# Altium PCB pcb.pcbdoc
Units mil, origin at the board's own origin, x right, y up, seen from the top; angles counter-clockwise.
Board outline 5725 x 7900 mil, 2 copper layers (Top Layer, Bottom Layer); 27 components, 170 nets, 303 pads, 64 vias.
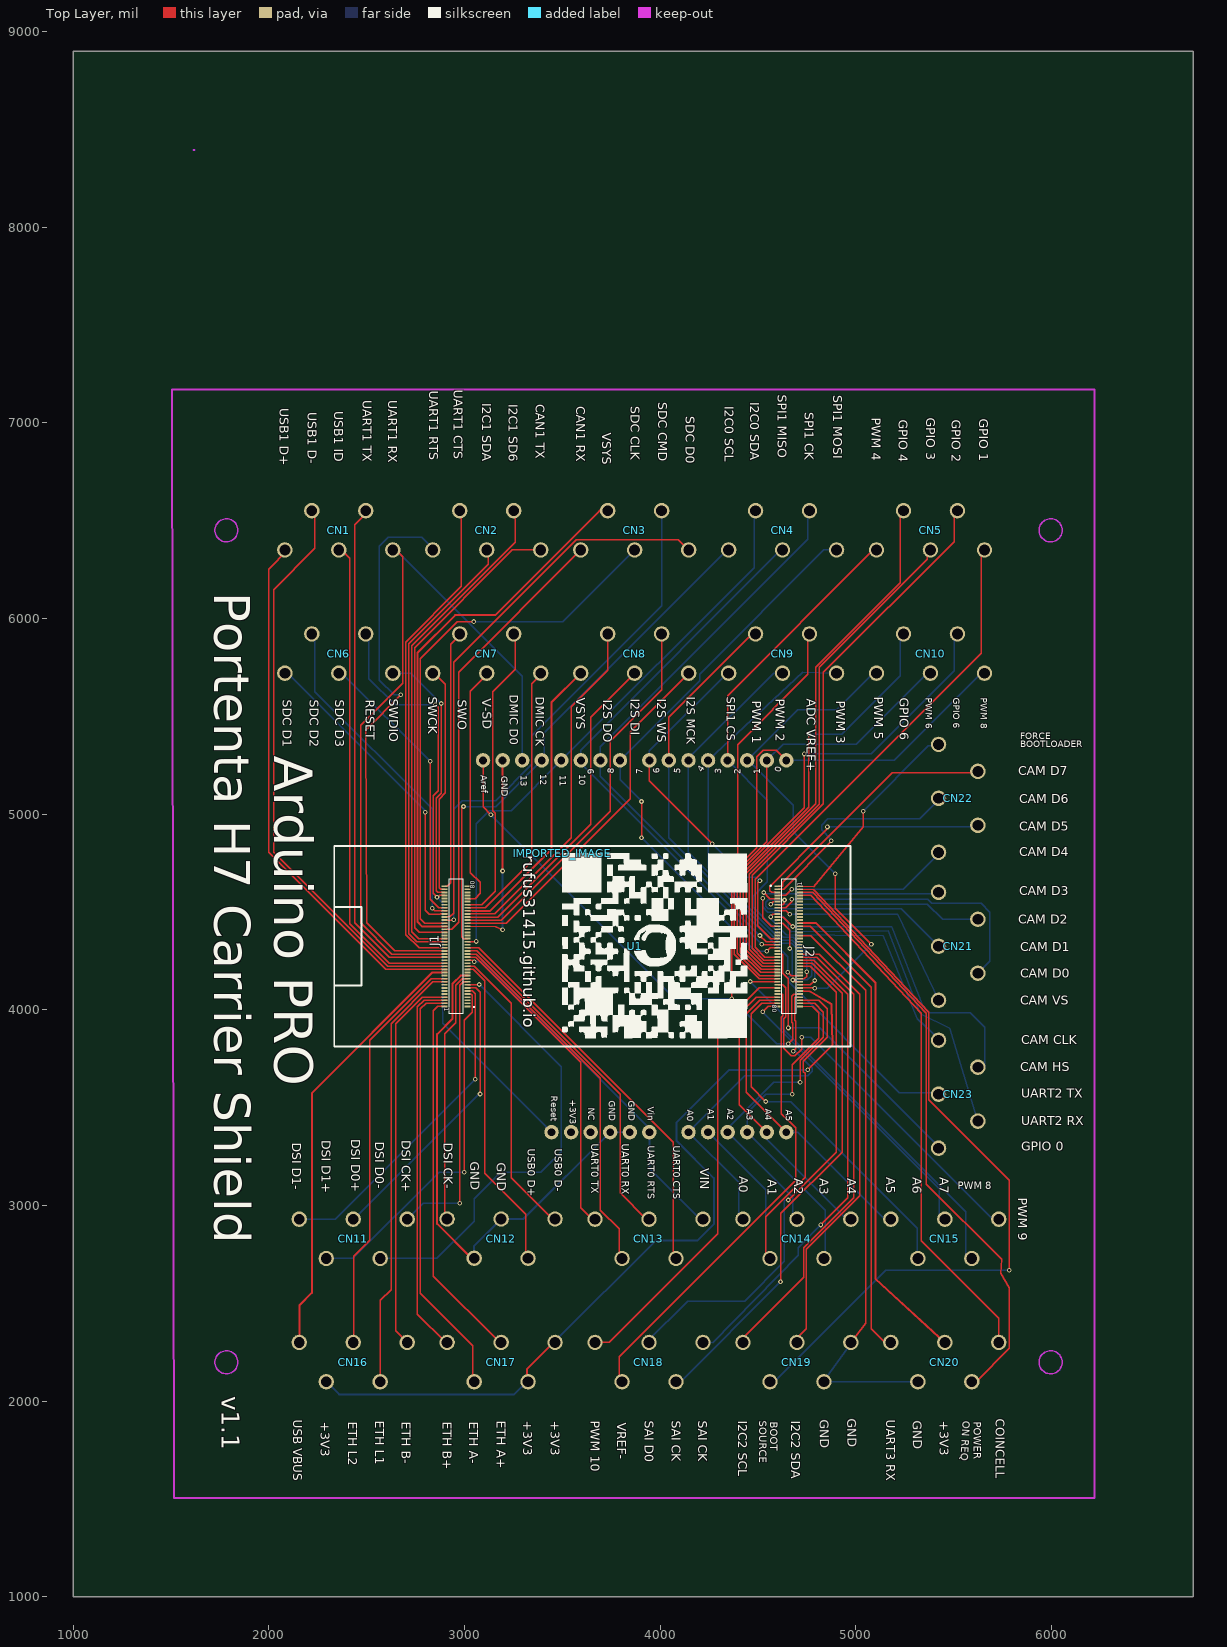
[diagram p0: Top Layer view]
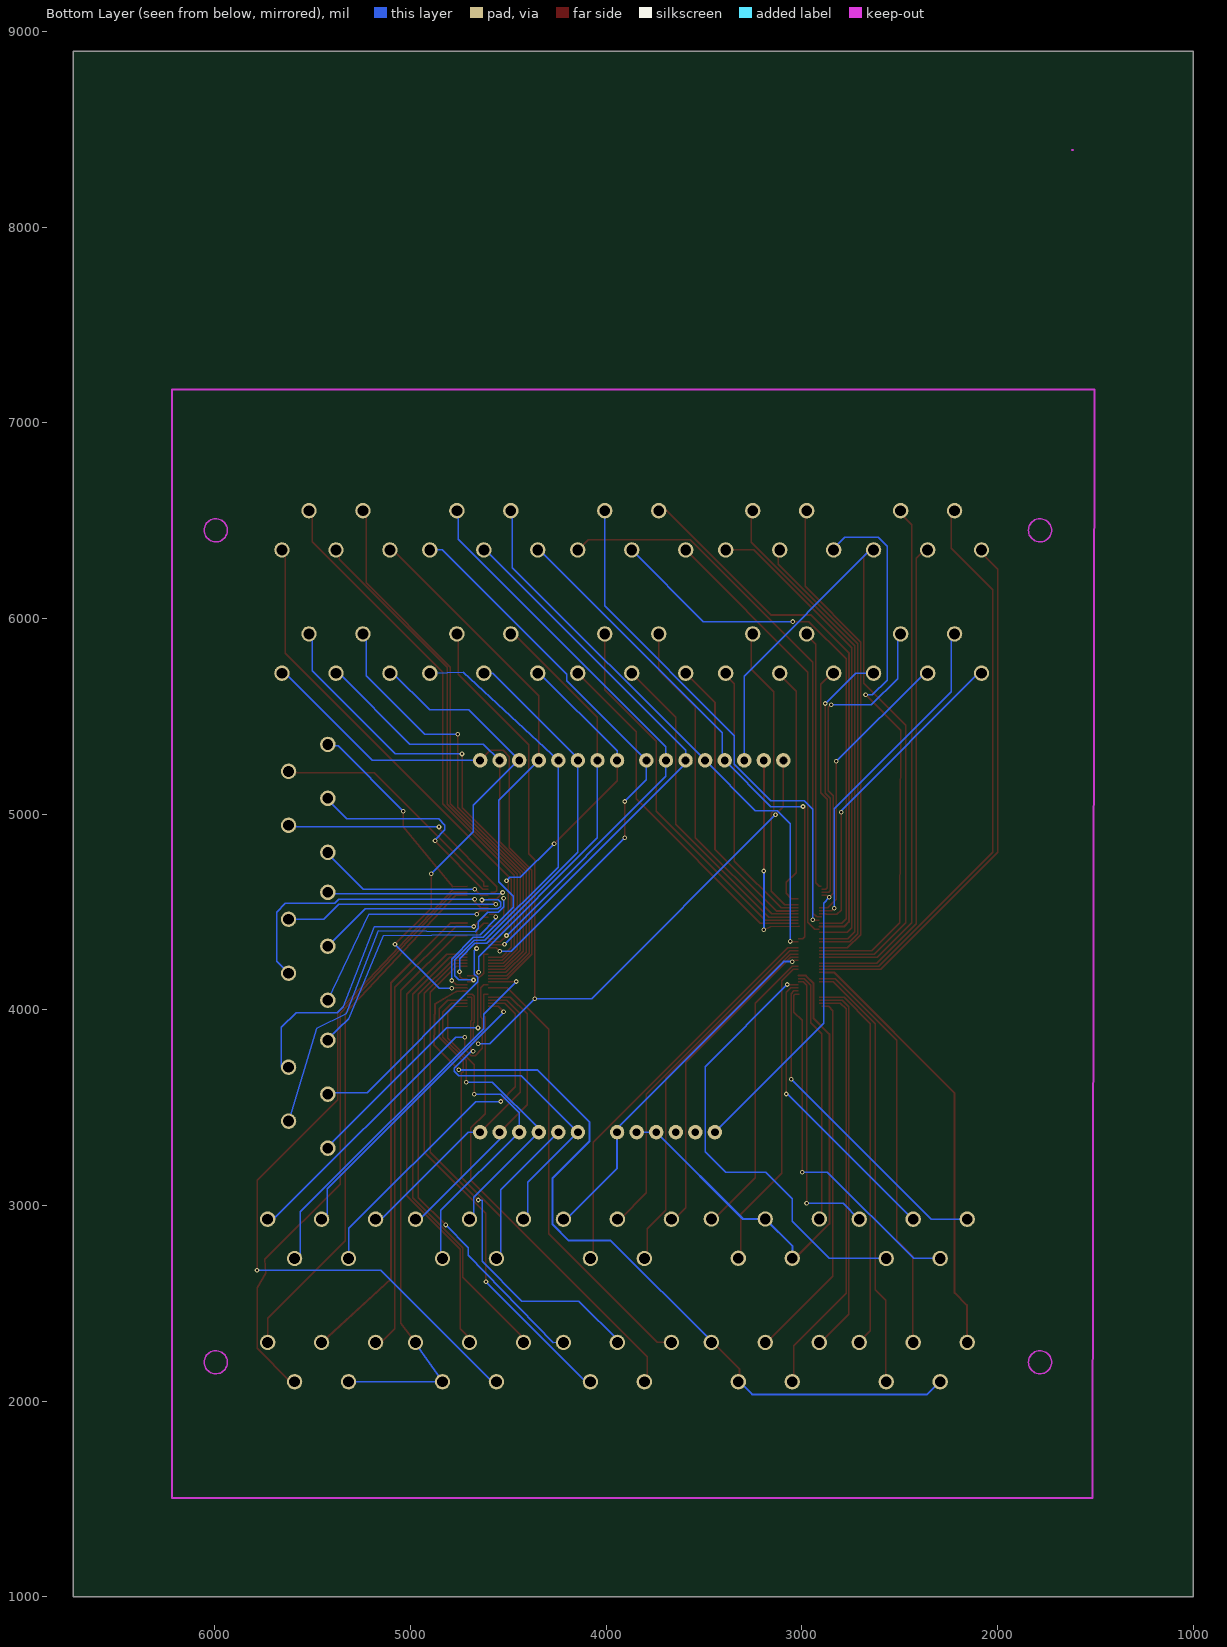
[diagram p1: Bottom Layer view, seen from below]

## Layer stack, top to bottom
Top Layer: signal copper (thickness not stored)
Dielectric: dielectric 12.6, FR-4, Dk 4.8
Bottom Layer: signal copper (thickness not stored)

## Board outline
6725,1000 1000,1000 1000,8900 6725,8900

## Components (designator, comment, footprint, x,y, rotation, side; value= is the part's Value field where it differs from the comment)
CN1 "WJ250B-3.50-5P" WJ250B-3.50-5P 2358.15,6451 r180 top
CN2 "WJ250B-3.50-5P" WJ250B-3.50-5P 3114.05,6451 r180 top
CN3 "WJ250B-3.50-5P" WJ250B-3.50-5P 3870.05,6451 r180 top
CN4 "WJ250B-3.50-5P" WJ250B-3.50-5P 4625.95,6451 r180 top
CN5 "WJ250B-3.50-5P" WJ250B-3.50-5P 5381.85,6451 r180 top
CN6 "WJ250B-3.50-5P" WJ250B-3.50-5P 2358.15,5821.1 r180 top
CN7 "WJ250B-3.50-5P" WJ250B-3.50-5P 3114.05,5821.1 r180 top
CN8 "WJ250B-3.50-5P" WJ250B-3.50-5P 3870.05,5821.1 r180 top
CN9 "WJ250B-3.50-5P" WJ250B-3.50-5P 4625.95,5821.1 r180 top
CN10 "WJ250B-3.50-5P" WJ250B-3.50-5P 5381.85,5821.1 r180 top
CN11 "WJ250B-3.50-5P" WJ250B-3.50-5P 2431.38,2829.92 r0 top
CN12 "WJ250B-3.50-5P" WJ250B-3.50-5P 3187.28,2830.98 r0 top
CN13 "WJ250B-3.50-5P" WJ250B-3.50-5P 3943.19,2829.92 r0 top
CN14 "WJ250B-3.50-5P" WJ250B-3.50-5P 4699.1,2829.92 r0 top
CN15 "WJ250B-3.50-5P" WJ250B-3.50-5P 5455,2829.92 r0 top
CN16 "WJ250B-3.50-5P" WJ250B-3.50-5P 2431.38,2200 r0 top
CN17 "WJ250B-3.50-5P" WJ250B-3.50-5P 3187.28,2200 r0 top
CN18 "WJ250B-3.50-5P" WJ250B-3.50-5P 3943.19,2200 r0 top
CN19 "WJ250B-3.50-5P" WJ250B-3.50-5P 4699.1,2200 r0 top
CN20 "WJ250B-3.50-5P" WJ250B-3.50-5P 5455,2200 r0 top
CN21 "WJ250B-3.50-5P" WJ250B-3.50-5P 5523.55,4325 r90 top
CN22 "WJ250B-3.50-5P" WJ250B-3.50-5P 5523.54,5080.9 r90 top
CN23 "WJ250B-3.50-5P" WJ250B-3.50-5P 5523.54,3569.1 r90 top
IMPORTED_IMAGE "IMPORTED_IMAGE" IMPORTED_IMAGE 3499.66,4799.65 r0 top
J1 "DF40C-80DP-0.4V_51_" DF40C80DP04V51 2956.61,4325 r90 top
J2 "DF40C-80DP-0.4V_51_" DF40C80DP04V51 4657.4,4325 r270 top
U1 "ARDUINO_SHIELDNO_SILK BIG" DUEMILANOVE_VIAS 3870,4325 r270 top

## Footprints (in the part's own frame and the unit in brackets; to place one, negate y for a bottom-side part, rotate by r counter-clockwise, add the part's x,y. Pads: shape width x height; smd on the part's side, far side on the other; paste and mask are expansions set on the pad)
DF40C80DP04V51 [mm]
  rect 0.23x0.787 smd: 1(-7.8,1.482) 2(-7.8,-1.482) 3(-7.4,1.482) 4(-7.4,-1.482) 5(-7,1.482) 6(-7,-1.482) 7(-6.6,1.482) 8(-6.6,-1.482) 9(-6.2,1.482) 10(-6.2,-1.482) 11(-5.8,1.482) 12(-5.8,-1.482) 13(-5.4,1.482) 14(-5.4,-1.482) 15(-5,1.482) 16(-5,-1.482) 17(-4.6,1.482) 18(-4.6,-1.482) 19(-4.2,1.482) 20(-4.2,-1.482) 21(-3.8,1.482) 22(-3.8,-1.482) 23(-3.4,1.482) 24(-3.4,-1.482) 25(-3,1.482) 26(-3,-1.482) 27(-2.6,1.482) 28(-2.6,-1.482) 29(-2.2,1.482) 30(-2.2,-1.482) 31(-1.8,1.482) 32(-1.8,-1.482) 33(-1.4,1.482) 34(-1.4,-1.482) 35(-1,1.482) 36(-1,-1.482) 37(-0.6,1.482) 38(-0.6,-1.482) 39(-0.2,1.482) 40(-0.2,-1.482) 41(0.2,1.482) 42(0.2,-1.482) 43(0.6,1.482) 44(0.6,-1.482) 45(1,1.482) 46(1,-1.482) 47(1.4,1.482) 48(1.4,-1.482) 49(1.8,1.482) 50(1.8,-1.482) 51(2.2,1.482) 52(2.2,-1.482) 53(2.6,1.482) 54(2.6,-1.482) 55(3,1.482) 56(3,-1.482) 57(3.4,1.482) 58(3.4,-1.482) 59(3.8,1.482) 60(3.8,-1.482) 61(4.2,1.482) 62(4.2,-1.482) 63(4.6,1.482) 64(4.6,-1.482) 65(5,1.482) 66(5,-1.482) 67(5.4,1.482) 68(5.4,-1.482) 69(5.8,1.482) 70(5.8,-1.482) 71(6.2,1.482) 72(6.2,-1.482) 73(6.6,1.482) 74(6.6,-1.482) 75(7,1.482) 76(7,-1.482) 77(7.4,1.482) 78(7.4,-1.482) 79(7.8,1.482) 80(7.8,-1.482)
  silkscreen extent -8.76,-2.39 8.76,0.88
DUEMILANOVE_VIAS [mil]
  round 74 hole 40: 3.3V(950,-325) 5V(950,-225) A0(950,275) A1(950,375) A2(950,475) A3(950,575) A4(950,675) A5(950,775) AREF(-950,-775) D2(-950,575) D3(-950,475) D4(-950,375) D5(-950,275) D6(-950,175) D7(-950,75) D8(-950,-75) D9(-950,-175) D10(-950,-275) D11(-950,-375) D12(-950,-475) D13(-950,-575) GND@0(950,-125) GND@1(950,-25) GND@2(-950,-675) RES(950,-425) RX(-950,775) TX(-950,675) VIN(950,75)
IMPORTED_IMAGE [mil]
  silkscreen extent 0,-945 945,0
WJ250B-3.50-5P [mm]
  round 2 hole 1.402: 1(-7.007,2.55) 4(-3.496,-2.55) 5(0.006,2.55) 8(3.506,-2.55) 9(7.007,2.55)

## Via types
v1: diameter 24.02, hole 12.2, Top Layer to Bottom Layer, 64 vias

## Nets (pads, with @x,y where several pads share a name; then routed paths per layer and width w, separated by ;. In a path a pad name is that pad's centre, name@x,y a point inside that pad or via, vN(x,y) a via of type N, cw(c..) or ccw(c..) an arc to the next point about the centre after c; other vN are vias at no path point)
J1_1: CN17.5 J1.1 | length 1902.3
  Top Layer w7.09: J1.1 2862.9,4017.9 2841.8,3996.8 2841.8,2639.7 CN17.5@3181.2,2300.4
J1_2: J1.2
J1_3: CN17.4 J1.3 | length 2164.5
  Top Layer w7.09: J1.3@2911.1,4033.7 2803.7,4033.7 2775,4005 2775,2552.4 3043.3,2284.1 CN17.4@3043.3,2099.6
J1_4: J1.4
J1_5: CN17.1 J1.5 | length 1940.1
  Top Layer w7.09: CN17.1@2905.1,2300.4 2760,2445.5 2760,4015 2794.4,4049.4 J1.5@2911.1,4049.4
J1_6: J1.6
J1_7: CN16.9 J1.7 | length 1971
  Top Layer w7.09: CN16.9@2708.7,2300.4 2650,2359.1 2650,3930 2785.2,4065.2 2888.2,4065.2 J1.7@2911.1,4065.2
J1_8: J1.8
J1_9: J1.9
J1_10: CN11.4 J1.10 | length 1835.6
  Top Layer w7.09: v1(2999.2,3170.7) 2999.2,3946.6 3040.8,3988.2 3040.8,4073.8 3035,4080 J1.10
  Bottom Layer w7.09: CN11.4@2295.2,2729.5 2429.5,2729.5 2870.7,3170.7 v1(2999.2,3170.7)
J1_11: J1.11
J1_12: CN11.1 J1.12 | length 1674.5
  Top Layer w7.09: J1.12@3017.8,4096.6 3040.8,4096.6 3054.3,4083.1 3054.3,3645.7 v1(3055,3645)
  Bottom Layer w7.09: CN11.1@2157,2930.3 2340.3,2930.3 v1(3055,3645)
J1_13: J1.13
J1_14: CN11.5 J1.14 | length 1503.4
  Top Layer w7.09: J1.14@3017.8,4112.4 3040.8,4112.4 3057.6,4112.4 3080,4090 v1(3080,3570)
  Bottom Layer w7.09: CN11.5@2433.1,2930.3 3072.8,3570 v1(3080,3570)
J1_15: J1.15
J1_16: CN11.8 J1.16 | length 2305.8
  Top Layer w7.09: J1.16@3017.84,4128.15 3073.15,4128.15 v1(3075,4130)
  Bottom Layer w7.09: CN11.8 2859.53,2729.53 3050,2920 3050,3035 3185,3170 3390,3170 3495,3275 3495,3710 v1(3075,4130)
J1_17: CN16.8 J1.17 | length 2227.5
  Top Layer w7.09: CN16.8@2570.9,2099.6 2570.9,2515.9 2625,2570 2625,3930 2838.9,4143.9 2888.2,4143.9 J1.17@2911.1,4143.9
J1_18: CN11.9 J1.18 | length 1464.8
  Top Layer w7.09: v1(2976.4,3011.7) 2976.4,4126.4 2993.9,4143.9 J1.18@3017.8,4143.9
  Bottom Layer w7.09: CN11.9@2708.7,2930.3 2790.1,3011.7 v1(2976.4,3011.7)
J1_19: CN16.5 J1.19 | length 2104.9
  Top Layer w7.09: CN16.5@2433.1,2300.4 2433.1,2741.7 2515,2823.6 2515,3845 2829.6,4159.6 J1.19@2911.1,4159.6
J1_20: CN12.1 J1.20 | length 1294.8
  Top Layer w7.09: CN12.1@2899.2,2930.4 2899.2,3879.2 2955,3935.1 2955,4125 2989.6,4159.6 2994.9,4159.6 J1.20@3017.8,4159.6
J1_21: J1.21
J1_22: CN12.4 CN12.5 J1.22 U1.GND@0 U1.GND@1 | length 2711.6
  Top Layer w10.24: J1.22@3017.8,4175.4 2980.4,4175.4 2940,4135 2940,3956 2860,3876 2860,2907 3037.5,2729.5 CN12.4@3043.3,2729.5
  Bottom Layer w7.09: 3745,3375 3845,3375
  Bottom Layer w10.24: CN12.4 3049.63,2793.48 CN12.5 3301.38,2931.38 3745,3375
J1_23: CN16.1 J1.23 | length 2247
  Top Layer w7.09: J1.23@2888.2,4191.1 J1.23@2911.1,4191.1
  Top Layer w10.24: CN16.1@2157,2300.4 2157,2491.4 2220,2554.4 2220,3575 2836.1,4191.1 J1.23@2888.2,4191.1
J1_24: J1.24
J1_25: CN1.9 J1.25 | length 2745.1
  Top Layer w7.09: CN1.9@2098.1,6350.6 2000,6252.5 2000,4805 2598.1,4206.9 2888.2,4206.9 J1.25@2911.1,4206.9
J1_26: CN12.8 J1.26 | length 1615.7
  Top Layer w7.09: J1.26@3017.8,4206.9 3045.3,4206.9 3103.6,4148.6 3103.6,3164.3 3313.05,2954.85 CN12.8@3313.05,2729.6
J1_27: CN1.8 J1.27 | length 2961.1
  Top Layer w7.09: CN1.8@2235.9,6551.4 2235.9,6358 2025,6147.1 2025,4805 2607.4,4222.6 J1.27@2911.1,4222.6
J1_28: CN12.9 J1.28 | length 1490.6
  Top Layer w7.09: J1.28@3017.8,4222.6 3040.8,4222.6 3050.3,4222.6 3238.2,4034.7 3238.2,3143.04 CN12.9@3450.85,2930.39
J1_29: CN1.5 J1.29 | length 2507.3
  Top Layer w7.09: CN1.5@2373.7,6350.6 2415,6309.3 2415,4440 2616.6,4238.4 2888.2,4238.4 J1.29@2911.1,4238.4
J1_30: J1.30
J1_31: J1.31
J1_32: CN13.9 J1.32 U1.VIN | length 1855.4
  Top Layer w7.09: J1.32@3017.8,4254.1 3041.5,4254.1 v1(3049.5,4246.1)
  Bottom Layer w10.24: v1(3049.5,4246.1) 3093.9,4246.1 3945,3395 U1.VIN 3945,3190.1 CN13.9@4204.8,2930.3
J1_33: CN1.4 J1.33 | length 2679.7
  Top Layer w7.09: CN1.4@2511.6,6551.4 2440,6479.8 2440,4445 2615.1,4269.9 2888.2,4269.9 J1.33@2911.1,4269.9
J1_34: CN13.1 J1.34 | length 1625.6
  Top Layer w7.09: J1.34@3017.8,4269.9 3040.8,4269.9 3056.8,4269.9 3595,3731.6 3595,2988.4 CN13.1@3653.1,2930.3
J1_35: CN1.1 J1.35 U1.D13 | length 3859.2
  Top Layer w7.09: CN1.1@2649.8,6350.6 2685,6315.4 2685,5670.2 2470,5455.2 2470,4445 2629.4,4285.6 J1.35@2911.1,4285.6
  Bottom Layer w7.09: CN1.1@2649.8,6350.6 3295,5705.4 U1.D13
J1_36: CN13.4 J1.36 | length 1901.3
  Top Layer w7.09: J1.36@3017.8,4285.6 3060.1,4285.6 3695,3650.7 3695,2977.1 3791.3,2880.8 CN13.4@3791.3,2729.5
J1_37: CN2.9 J1.37 | length 2862.6
  Top Layer w7.09: v1(2675,5610) 2495,5430 2500,4445 2643.6,4301.4 J1.37@2911.1,4301.4
  Bottom Layer w7.09: v1(2675,5610) 2640,5610 2565,5685 2565,6370 2610,6415 2781.7,6415 CN2.9@2846.1,6350.6
J1_38: CN13.5 J1.38 | length 1775.4
  Top Layer w7.09: J1.38@3017.8,4301.4 3063.5,4301.4 3795,3569.8 3795,3064.5 CN13.5@3929.2,2930.3
J1_39: CN2.8 J1.39 | length 2523.2
  Top Layer w7.09: J1.39@2911.1,4317.1 2767.9,4317.1 2700,4385 2700,5880 2983.9,6163.9 CN2.8@2983.9,6551.4
J1_40: CN13.8 J1.40 | length 2054.7
  Top Layer w7.09: J1.40@3017.8,4317.1 3073.2,4317.1 4067,3323.4 CN13.8@4067,2729.5
J1_41: J1.41
J1_42: J1.42
J1_43: CN2.5 J1.43 | length 2342.3
  Top Layer w7.09: J1.43@2911.1,4348.6 2756.4,4348.6 2715,4390 2715,5870 3121.7,6276.7 CN2.5@3121.7,6350.6
J1_44: CN4.8 J1.44 U1.D11 | length 2898.9
  Top Layer w7.09: J1.44@3017.8,4348.6 3040.8,4348.6 3060,4348.6 v1(3060,4350)
  Bottom Layer w7.09: v1(3060,4350) 3060,4952.2 3126.3,5018.5 3238.5,5018.5 U1.D11 4480,6260 CN4.8@4480,6551.4
J1_45: CN2.4 J1.45 | length 2566.6
  Top Layer w7.09: J1.45@2911.1,4364.4 2765.6,4364.4 2730,4400 2730,5860 3259.6,6389.6 CN2.4@3259.6,6551.4
J1_46: CN4.9 J1.46 U1.D12 | length 2663.2
  Top Layer w7.09: v1@2985,5034.9 2985,4374.3 2994.9,4364.4 J1.46@3017.8,4364.4
  Bottom Layer w7.09: v1(2994.9,5039.3) 3159.3,5039.3 U1.D12 3408.5,5288.5 3408.5,5416.9 CN4.9@4342.2,6350.6
J1_47: J1.47
J1_48: J1.48
J1_49: CN2.1 J1.49 | length 2466.2
  Top Layer w7.09: J1.49@2911.1,4395.9 2888.2,4395.9 2769.1,4395.9 2745,4420 2745,5850 3245.6,6350.6 CN2.1@3397.8,6350.6
J1_50: J1.50
J1_51: CN3.9 J1.51 | length 2235.4
  Top Layer w7.09: J1.51@2911.1,4411.6 2934.1,4411.6 2970,4447.5 2970,5726.4 CN3.9
J1_52: J1.52
J1_53: CN3.8 J1.53 | length 2808.4
  Top Layer w10.24: J1.53@2911.1,4427.4 2782.6,4427.4 2760,4450 2760,5825 2952.9,6017.9 3157.4,6017.9 3690.8,6551.4 CN3.8
J1_54: J1.54 | length 183.1
  Top Layer w9.84: J1.54 3160,4425 3195,4410
J1_55: CN3.5 J1.55 | length 2800.1
  Top Layer w7.09: J1.55@2911.1,4443.1 2888.2,4443.1 2796.9,4443.1 2775,4465 2775,5795 2964.4,5984.4 v1(3047.4,5984.4)
  Bottom Layer w7.09: v1(3047.4,5984.4) 3503.6,5984.4 CN3.5
J1_56: CN8.1 J1.56 | length 1859.3
  Top Layer w7.09: J1.56@3017.8,4443.1 3040.8,4443.1 3213.1,4443.1 3847.9,5077.9 3847.9,5422.7 CN8.1
J1_57: CN3.4 J1.57 | length 2665.6
  Top Layer w7.09: J1.57@2911.1,4458.9 2937.4,4458.9 2938.5,4460 v1(2945,4460)
  Bottom Layer w7.09: v1(2945,4460) 2945,5024.5 2988.9,5068.4 3159,5068.4 3345,5254.4 3345,5401.8 4007.7,6064.4 CN3.4
J1_58: CN8.4 J1.58 | length 1972.9
  Top Layer w7.09: J1.58@3017.8,4458.9 3188.9,4458.9 3745,5015 3745,5372.2 4007.7,5634.9 CN8.4
J1_59: CN3.1 J1.59 | length 2815.6
  Top Layer w7.09: J1.59@2900,4475 2923,4475 ; 2925,4475 2945,4495 2945,5777.5 3570.6,6403.1 4093.4,6403.1 CN3.1
J1_60: CN8.5 J1.60 | length 1687.9
  Top Layer w7.09: J1.60@3017.8,4474.6 3040.8,4474.6 3169.6,4474.6 3645,4950 3645,5495.9 CN8.5
J1_61: CN6.9 J1.61 | length 1621.8
  Top Layer w7.09: v1(2800,5010) 2800,4510 2821,4489 2876.3,4489 2877.6,4490.3 J1.61@2911.1,4490.3
  Bottom Layer w7.09: CN6.9@2098.1,5720.7 2800,5018.8 v1(2800,5010)
J1_62: CN8.8 J1.62 | length 1807.6
  Top Layer w7.09: J1.62@3017.8,4490.3 3155.3,4490.3 3545,4880 3545,5549.7 3732,5736.7 CN8.8
J1_63: CN6.8 J1.63 | length 1731.5
  Top Layer w7.09: v1(2835,4520) 2848.9,4506.1 J1.63@2911.1,4506.1
  Bottom Layer w7.09: CN6.8@2235.9,5921.5 2235.9,5626.2 2835,5027.1 v1(2835,4520)
J1_64: CN8.9 J1.64 | length 1519.8
  Top Layer w7.09: J1.64@3017.8,4506.1 3040.8,4506.1
  Top Layer w10.24: 3040.8,4506.1 3131.2,4506.1 3445,4819.9 3445,5571.5 CN8.9
J1_65: CN6.5 J1.65 | length 1447
  Top Layer w7.09: v1(2825,5270) 2825,4565 2868.2,4521.8 2888.2,4521.8 J1.65@2911.1,4521.8
  Bottom Layer w7.09: CN6.5@2373.7,5720.7 2824.4,5270 v1(2825,5270)
J1_66: CN7.1 J1.66 | length 1408.4
  Top Layer w7.09: J1.66@3017.8,4521.8 3106.8,4521.8 3345,4760 3345,5667.8 CN7.1@3397.8,5720.7
J1_67: J1.67
J1_68: CN7.4 J1.68 | length 1535.1
  Top Layer w7.09: J1.68@3017.8,4537.6 3087.6,4537.6 3157.3,4607.3 3157.3,5005.7 3145,5018 3145,5625.8 3259.6,5740.5 CN7.4@3259.6,5921.5
J1_69: J1.69
J1_70: J1.70
J1_71: J1.71
J1_72: CN7.5 J1.72 | length 1257.3
  Top Layer w7.09: J1.72@3017.8,4569.1 3054.1,4569.1 3080,4595 3080,4651.4 3030,4701.4 3030,5629 CN7.5@3121.7,5720.7
J1_73: CN6.4 J1.73 U1.RES | length 3115.4
  Top Layer w7.09: v1(2850.8,5559.6) 2865,5545.4 2865,5120 2840,5095 2840,4595 v1(2860,4575) 2875,4585 J1.73
  Bottom Layer w7.09: CN6.4@2511.6,5921.5 2511.6,5693.4 2645.4,5559.6 v1(2850.8,5559.6) ; v1(2860,4575) 2889.1,4545.9 2889.1,3930.9 U1.RES
J1_74: J1.74
J1_75: CN6.1 J1.75 | length 1309.4
  Top Layer w7.09: v1(2881.2,5565.8) 2881.2,5107 2855,5080.8 2855,4610 2864.4,4600.6 J1.75
  Bottom Layer w7.09: CN6.1@2649.8,5720.7 2726.3,5720.7 v1(2881.2,5565.8)
J1_76: J1.76
J1_77: CN7.9 J1.77 | length 1164.9
  Top Layer w7.09: CN7.9@2846.1,5720.7 2903.1,5663.7 2903.1,5109.8 2870,5076.7 2870,4625 2878.7,4616.3 J1.77
J1_78: J1.78
J1_79: CN7.8 J1.79 | length 1329.9
  Top Layer w7.09: J1.79@2901.37,4632.09 2912.09,4632.09 2930,4650 2930,5867.6 CN7.8@2983.9,5921.5
J1_80: J1.80
J2_1: CN22.9 J2.1 | length 1074.2
  Top Layer w7.09: J2.1@4710.8,4632.1 4785,4630 5037.9,4936.3 v1(5037.9,5015.7)
  Bottom Layer w7.09: v1(5037.9,5015.7) 5371,5348.9 CN22.9@5423.2,5348.9
J2_2: CN22.8 J2.2 | length 1271.2
  Top Layer w7.09: J2.2@4604.1,4632.1 4627,4632.1 4627,4651.8 5186.3,5211.1 CN22.8@5623.9,5211.1
J2_3: CN19.4 J2.3 | length 3904.6
  Top Layer w7.09: J2.3@4710.8,4616.3 4785,4615 5373.7,3988.1 5373.7,3541.6 5785,3130.3 v1(5785,2670)
  Bottom Layer w7.09: CN19.4@4539.3,2099.6 4582.2,2099.6 5152.6,2670 v1(5785,2670)
J2_4: CN22.5 J2.4 | length 1127.7
  Top Layer w7.09: J2.4@4604.1,4616.3 4630.6,4616.3 4875,4860.7 v1(4875,4865)
  Bottom Layer w7.09: v1(4875,4865) 4875,4870.5 4825,4920.5 4825,4943.6 4857.5,4976.1 5326,4976.1 CN22.5@5423.2,5073.3
J2_5: CN20.8 J2.5 | length 3093.5
  Top Layer w7.09: J2.5@4710.8,4600.6 4780,4600 5360.2,3982.5 5360.2,3109.8 5745,2725 5740,2655 5785,2580 5785,2270 5614.6,2099.6 CN20.8@5563.1,2099.6
J2_6: CN22.4 J2.6 | length 1250.4
  Top Layer w7.09: J2.6@4590,4600 4570,4600 4560,4610 4560,4630 4855,4925 v1(4855,4935)
  Bottom Layer w7.09: v1(4855,4935) 4855.4,4935.4 CN22.4@5623.9,4935.4
J2_7: CN20.9 J2.7 | length 2732
  Top Layer w7.09: J2.7@4710.8,4584.8 4770,4585 5335,3983.5 5335,2820 5730,2425 5730,2300.4 CN20.9
J2_8: CN22.1 J2.8 | length 907
  Top Layer w7.09: J2.8@4604.1,4584.8 4641.1,4584.8 v1(4672.1,4615.8)
  Bottom Layer w7.09: v1(4672.1,4615.8) 5241.7,4615.8 CN22.1@5423.2,4797.2
J2_9: J2.9
J2_10: CN21.9 J2.10 | length 985.5
  Top Layer w7.09: v1(4530,4600) 4560.9,4569.1 4581.1,4569.1 J2.10@4604.1,4569.1
  Bottom Layer w7.09: v1(4530,4600) 4536.2,4593.8 5416.1,4593.8 CN21.9
J2_11: J2.11
J2_12: CN21.8 J2.12 | length 1112.5
  Top Layer w7.09: v1(4565,4540) 4578.3,4553.3 4581.1,4553.3
  Bottom Layer w7.09: v1(4565,4540) 5366.5,4540 5443.5,4463 CN21.8@5624,4463
J2_13: J2.13
J2_14: CN21.5 J2.14 | length 1139.2
  Top Layer w7.09: J2.14@4604.1,4537.6 4627,4537.6 4635.6,4546.2 v1(4635.6,4561.8)
  Bottom Layer w7.09: v1(4635.6,4561.8) 4551.8,4561.8 4540,4550 4540,4530 4553.9,4516.1 5232.3,4516.1 CN21.5
J2_15: J2.15
J2_16: CN21.4 J2.16 | length 1471.8
  Top Layer w7.09: J2.16@4604.1,4521.8 4642.9,4521.8 4673.2,4552.2 v1(4673.2,4565.4)
  Bottom Layer w7.09: v1(4673.2,4565.4) 5367,4565.4 5387.6,4544.8 5640.2,4544.8 5685,4500 5685,4248.3 CN21.4@5624,4187.3
J2_17: J2.17
J2_18: CN21.1 J2.18 | length 1105.6
  Top Layer w7.09: J2.18@4604.1,4506.1 4645.5,4506.1 v1(4662.7,4488.9)
  Bottom Layer w7.09: v1(4662.7,4488.9) 5215,4490 CN21.1
J2_19: J2.19
J2_20: CN23.9 J2.20 | length 1268.4
  Top Layer w7.09: v1(4565,4475) 4575,4490 J2.20@4599,4490
  Bottom Layer w7.09: v1(4565,4475) 4565,4465 4645,4385 5140,4380 5315,3955 CN23.9@5423.1,3853
J2_21: J2.21
J2_22: CN23.8 J2.22 | length 1603.4
  Top Layer w7.09: J2.22@4604.1,4474.6 4629,4474.6 v1(4677.7,4426)
  Bottom Layer w7.09: v1(4677.7,4426) 5185,4426 5345,4015 5375,3985 5585,3985 5660,3910 5660,3715 CN23.8@5660.4,3707.14
J2_23: J2.23
J2_24: J2.24
J2_25: CN20.5 J2.25 | length 2510.7
  Top Layer w10.24: J2.25@4710.8,4443.1 4796.9,4443.1 5100,4140 5100,2625.7 CN20.5
J2_26: CN23.5 J2.26 | length 1350.6
  Top Layer w7.09: J2.26@4604.1,4443.1 4627,4443.1 4662.9,4407.2 v1(4662.9,4313.7)
  Bottom Layer w7.09: v1(4662.9,4313.7) 4674.7,4301.9 4674.7,4183.4 4656.9,4165.6 4656.9,4143.2 5222.8,3577.2 CN23.5@5423.1,3577.2
J2_27: CN20.1 J2.27 | length 2341.9
  Top Layer w7.09: J2.27@4710.8,4427.4 4767.6,4427.4 5080,4115 5080,2369.6 CN20.1@5149.2,2300.4
J2_28: CN23.4 J2.28 | length 2071.2
  Top Layer w7.09: v1(4525,4570) 4525,4470 4567.6,4427.4 4581.1,4427.4 J2.28@4604.1,4427.4
  Bottom Layer w7.09: v1(4525,4570) 4525,4526.3 4551.3,4500 4605,4500 4655.7,4449.3 4655.7,4416.9 4670,4400 5165,4405 5330,3980 5480,3905 CN23.4
J2_29: J2.29
J2_30: J2.30
J2_31: J2.31
J2_32: J2.32
J2_33: CN19.8 CN19.9 CN20.4 J2.33 | length 2993.2
  Top Layer w7.09: J2.33@4710.8,4380.1 4733.7,4380.1 4769.9,4380.1 5050,4100 5050,2397.6 CN19.9@4975,2300
  Bottom Layer w7.09: CN19.8@4815,2099.6 4952.8,2099.6 CN20.4@5287.4,2099.6 ; CN19.8@4835,2100 CN19.9@4975,2295
J2_34: J2.34
J2_35: J2.35
J2_36: CN9.9 J2.36 U1.D7 | length 1856.2
  Top Layer w7.09: U1.D7 3945,5171.2 v1(4267,4849.3) ; v1(4510,4660) 4500,4650 4500,4430 4565.6,4364.4 4581.1,4364.4 J2.36@4604.1,4364.4
  Bottom Layer w7.09: U1.D7 3945,5323.5 CN9.9@4342.2,5720.7 ; v1(4267,4849.3) 4439.1,4677.2 4492.8,4677.2 v1(4510,4660)
J2_37: J2.37
J2_38: CN4.4 J2.38 U1.D9 | length 3055.4
  Top Layer w7.09: v1(4510,4380) 4541.38,4348.62 J2.38@4604.05,4348.62
  Bottom Layer w7.09: v1(4510,4380) 3695,5195 U1.D9 3695,5345 4755.7,6405.7 CN4.4@4755.7,6551.4
J2_39: J2.39
J2_40: CN4.5 J2.40 U1.D10 | length 2907.3
  Top Layer w7.09: v1(4520,4335) 4522.13,4332.87 J2.40@4604.05,4332.87
  Bottom Layer w7.09: v1(4520,4335) 3595,5260 U1.D10 3595,5327.8 CN4.5@4617.8,6350.6
J2_41: J2.41
J2_42: CN4.1 J2.42 U1.D8 | length 2950.8
  Top Layer w7.09: v1(3905,4880) v1(3905,5065) ; v1(4545,4300) 4562.13,4317.13 J2.42@4604.05,4317.13
  Bottom Layer w7.09: v1(3905,4880) 4485,4300 v1(4545,4300) ; v1(3905,5065) 3795,5175 U1.D8 4202.4,5682.4 4202.4,5715.5 4837.5,6350.6 CN4.1@4893.9,6350.6
J2_43: J2.43
J2_44: J2.44
J2_45: CN19.5 J2.45 | length 2316
  Top Layer w7.09: CN19.5@4677.2,2300.4 4747.2,2370.4 4747.2,2777.7 5020,3050.5 5020,4080 4814.4,4285.6 J2.45@4710.8,4285.6
J2_46: CN23.1 J2.46 | length 1431.2
  Top Layer w7.09: J2.46@4604.1,4285.6 4627,4285.6 4627,4187.2 4655.8,4158.5 v1(4655.8,3907.9)
  Bottom Layer w7.09: v1(4655.8,3907.9) 4816.4,3907.9 CN23.1@5423.1,3301.1
J2_47: CN19.1 J2.47 | length 2381.4
  Top Layer w7.09: CN19.1@4401.1,2300.4 4733.7,2632.9 4733.7,2783.3 4990,3039.6 4990,4080 4800.1,4269.9 J2.47@4710.8,4269.9
J2_48: CN5.1 J2.48 | length 2649.7
  Top Layer w7.09: J2.48@4604.1,4269.9 4535.1,4269.9 4485,4320 4485,4667 5641.9,5823.9 CN5.1@5641.9,6350.6
J2_49: CN18.9 J2.49 | length 2449.4
  Top Layer w7.09: J2.49@4710.8,4254.1 4733.7,4254.1 4785.9,4254.1 4960,4080 4960,3040.6 v1(4820.4,2901)
  Bottom Layer w7.09: CN18.9@4204.8,2300.4 4270,2300 4705,2745 4705,2785.6 v1(4820.4,2901)
J2_50: CN5.4 J2.50 | length 2823.9
  Top Layer w7.09: J2.50@4604.1,4254.1 4581.1,4254.1 4530.9,4254.1 4470,4315 4470,4688.9 4834.7,5053.6 4834.7,5724.7 5503.7,6393.7 CN5.4@5503.7,6551.4
J2_51: CN18.8 J2.51 | length 2647.6
  Top Layer w7.09: v1(4615,2610) 4617.2,2612.2 4617.2,2959.6 4930,3272.4 4930,4085 4776.6,4238.4 J2.51@4710.8,4238.4
  Bottom Layer w7.09: CN18.8@4067,2099.6 4104.6,2099.6 v1(4615,2610)
J2_52: CN5.5 J2.52 | length 2596.6
  Top Layer w7.09: J2.52@4604.1,4238.4 4581.1,4238.4 4526.6,4238.4 4455,4310 4455,4693 4813.7,5051.7 4813.7,5749.9 5365.8,6302 CN5.5@5365.8,6350.6
J2_53: CN18.5 J2.53 | length 2618.1
  Top Layer w7.09: v1(4655,3028.4) 4900,3273.4 4900,4090 4767.4,4222.6 4733.7,4222.6 J2.53@4710.8,4222.6
  Bottom Layer w7.09: CN18.5@3929.2,2300.4 4140.7,2511.9 4431.9,2511.9 4635,2715 4635,3028.4 v1(4655,3028.4)
J2_54: CN5.8 J2.54 | length 2771
  Top Layer w7.09: J2.54@4604.1,4222.6 4581.1,4222.6 4522.4,4222.6 4440,4305 4440,4697.1 4796.3,5053.4 4796.3,5751.5 5228,6183.3 CN5.8@5228,6551.4
J2_55: J2.55
J2_56: CN10.8 J2.56 | length 2270.7
  Top Layer w7.09: J2.56@4604.1,4206.9 4518.1,4206.9 4425,4300 4425,4701.2 4759.2,5035.4 v1(4759.2,5408.1)
  Bottom Layer w7.09: v1(4759.2,5408.1) 4928.1,5408.1 5228,5708 CN10.8@5228,5921.5
J2_57: J2.57
J2_58: CN10.4 J2.58 | length 2516.4
  Top Layer w7.09: J2.58@4604.1,4191.1 4513.9,4191.1 4410,4295 4410,4705.3 4737.3,5032.6 v1(4737.3,5308.2)
  Bottom Layer w7.09: v1(4737.3,5308.2) 5078.2,5308.2 5503.7,5733.7 CN10.4@5503.7,5921.5
J2_59: CN9.8 J2.59 U1.D6 | length 2230.7
  Top Layer w7.09: U1.D6 4045,5494.4 4472,5921.5 CN9.8@4480,5921.5 ; v1(4652.7,4192.5) 4669.9,4175.4 J2.59@4710.8,4175.4
  Bottom Layer w7.09: U1.D6 4045,4880 4652.7,4272.3 v1(4652.7,4192.5)
J2_60: CN10.5 J2.60 U1.TX | length 2309.1
  Top Layer w7.09: U1.TX 4545,4859.4 4395,4709.4 4395,4290 4509.6,4175.4 4581.1,4175.4 J2.60@4604.1,4175.4
  Bottom Layer w7.09: U1.TX 4628.5,5358.4 5003.6,5358.4 CN10.5@5365.8,5720.7
J2_61: CN9.5 J2.61 U1.D5 | length 2125.4
  Top Layer w7.09: J2.61@4710.8,4159.6 4733.7,4159.6 4750,4170 v1(4750,4195)
  Bottom Layer w7.09: U1.D5@4175.4,5275 U1.D5 ; CN9.5@4617.8,5720.7 4580.7,5720.7 4155.2,5295.2 U1.D5 ; v1(4750,4195) 4750,4260.9 4671.5,4339.4 4610.6,4339.4 4145,4805 U1.D5
J2_62: CN10.1 J2.62 U1.RX | length 2699.8
  Top Layer w7.09: J2.62@4604.1,4159.6 4505.4,4159.6 4380,4285 4380,4713.5 4495,4828.5 4495,5294.4 4527.6,5327.1 4592.9,5327.1 U1.RX
  Bottom Layer w7.09: U1.RX 5196.3,5275 CN10.1@5641.9,5720.7
J2_63: CN9.1 J2.63 U1.D4 | length 2318.5
  Top Layer w7.09: v1(4678.8,4152.9) 4687.8,4143.9 J2.63@4710.8,4143.9
  Bottom Layer w7.09: v1(4678.8,4152.9) 4752.9,4152.9 4775,4175 4775,4255.1 4675.1,4355 4620,4355 4245,4730 U1.D4 4730,5725 CN9.1@4893.9,5720.7
J2_64: CN15.8 J2.64 | length 2017
  Top Layer w7.09: v1(4460,4145) 4580,4145 4581.1,4143.9 J2.64@4604.1,4143.9
  Bottom Layer w7.09: v1(4460,4145) 4626.7,3978.3 4626.7,3904.7 5563.1,2968.3 CN15.8@5563.1,2729.5
J2_65: CN5.9 J2.65 U1.D3 | length 2871.8
  Top Layer w7.09: U1.D3 4345,5605.4 CN5.9@5090.2,6350.6 ; J2.65@4710.8,4128.1 4768.1,4128.1 v1(4790,4150)
  Bottom Layer w7.09: U1.D3 4548.8,5071.2 4548.8,4653.8 4475,4580 4475,4525 4630,4370 4679.2,4370 4790,4259.2 v1(4790,4150)
J2_66: CN15.9 J2.66 | length 1901.6
  Top Layer w7.09: J2.66@4604.1,4128.1 4627,4128.1 4641.4,4113.8 4641.4,3964.3 4633,3955.9 4633,3803.2 4670.9,3765.2 4689.1,3765.2 4723.3,3799.4 v1(4723.3,3860.6)
  Bottom Layer w7.09: v1(4723.3,3860.6) 4770.5,3860.6 CN15.9@5700.9,2930.3
J2_67: CN10.9 J2.67 U1.D2 | length 2500
  Top Layer w7.09: J2.67@4712.37,4110.78 4710.75,4112.4 4787.6,4112.4 v1(4790,4110) ; v1(4895,4695) 4895,4520 v1(5080,4335)
  Bottom Layer w7.09: U1.D2 4703.1,5533.1 4902.7,5533.1 CN10.9@5090.2,5720.7 ; U1.D2@4447.45,5277.45 4680,5044.9 4680,4910 v1(4895,4695) ; v1(4790,4110) 4855,4110 v1(5080,4335)
J2_68: CN18.1 J2.68 | length 2313.7
  Top Layer w7.09: CN18.1@3653.1,2300.4 3740.4,2300.4 4295,2855 4295,3900 4507.4,4112.4 4581.1,4112.4 J2.68@4604.1,4112.4
J2_69: CN16.4 CN17.8 CN17.9 J2.69 | length 4353.3
  Top Layer w7.87: J2.69@4710.8,4096.6 4733.7,4096.6
  Top Layer w10.24: CN17.8@3319,2099.6 3319,2162.6 CN17.9@3456.8,2300.4 ; 4733.7,4096.6 4765,4095 4875,4030 4880,3819.8 v1(4754.1,3693.9)
  Bottom Layer w10.24: CN16.4@2295.2,2099.6 2359.8,2035 3254.4,2035 CN17.8@3319,2099.6 ; CN17.9@3456.8,2300.4 3977.3,2820.9 4190.9,2820.9 4275,2905 4275,3140 4085,3330 4085,3425 4353.9,3693.9 v1(4754.1,3693.9)
J2_70: J2.70
J2_71: CN9.4 J2.71 U1.AREF | length 4623.9
  Top Layer w7.09: U1.AREF 3095,5037 v1(3135.4,4996.6) ; v1(4365.6,4056.3) 4365.6,4767.4 4397.1,4799 4397.1,5355.8 4755.7,5714.4 CN9.4@4755.7,5921.5 ; v1(4654.9,3826.3) 4679,3850.4 4679,3931.2 4673.8,3936.4 4673.8,4070.7 4684,4080.9 J2.71@4710.8,4080.9
  Bottom Layer w7.09: v1(3135.4,4996.6) 4075.6,4056.3 v1(4365.6,4056.3) 4595.6,3826.3 v1(4654.9,3826.3)
J2_72: CN18.4 J2.72 | length 2411.4
  Top Layer w7.09: CN18.4@3791.3,2099.6 3791.3,2226.3 4693.2,3128.2 4693.2,3396.7 4619.5,3470.4 4619.5,3961.5 4627,3969.1 4627,4080.9 J2.72@4604.1,4080.9
J2_73: CN14.1 J2.73 U1.A0 | length 1767.1
  Top Layer w7.09: v1(4680.9,3788.1) 4693.4,3800.6 4693.4,3942.6 4687.8,3948.2 4687.8,4065.2 J2.73@4710.8,4065.2
  Bottom Layer w7.09: CN14.1@4401.1,2930.3 4401.1,3118.9 U1.A0 4433.5,3663.5 4754.7,3663.5 4776.9,3685.7 4776.9,3702.2 4691.1,3788.1 v1(4680.9,3788.1)
J2_74: CN14.9 J2.74 U1.A4 | length 1511
  Top Layer w7.09: U1.A4 4405,3515 4405,3980 4490.2,4065.2 J2.74@4604.1,4065.2
  Bottom Layer w7.09: U1.A4 4545,3338.1 CN14.9@4952.8,2930.3
J2_75: CN14.4 J2.75 U1.A1 | length 2343.7
  Top Layer w7.09: CN14.4@4539.3,2729.5 4539.3,2943.8 4740.8,3145.3 4740.8,3676.2 4732.2,3684.8 4732.2,3737.6 4855,3860.4 4855,4005 4810,4050 J2.75@4710.75,4049.41
  Bottom Layer w7.09: U1.A1 4539.3,3080.7 CN14.4@4539.3,2729.5
J2_76: CN15.1 J2.76 U1.A5 | length 1571.2
  Top Layer w7.09: J2.76@4604.1,4049.4 4509.4,4049.4 4440,3980 4440,3580 U1.A5
  Bottom Layer w7.09: U1.A5 4704.5,3375 CN15.1@5149.2,2930.3
J2_77: CN14.5 J2.77 U1.A2 | length 1619
  Top Layer w7.09: J2.77@4710.75,4033.66 4790,4033.66 4835,3988.66 4835,3861.3 ; v1(4715.2,3630.9) 4715.2,3741.5 4835,3860
  Bottom Layer w7.09: CN14.5@4677.2,2930.3 4677.2,3042.8 U1.A2 4345,3394.1 4581.8,3630.9 v1(4715.2,3630.9)
J2_78: CN15.4 J2.78 | length 1866.7
  Top Layer w7.09: v1(4540,3531.7) 4465,3606.7 4465,3980 4518.7,4033.7 4581.1,4033.7 J2.78@4604.1,4033.7
  Bottom Layer w7.09: v1(4540,3531.7) 4668.3,3531.7 5315,2885 5315,2729.5 CN15.4@5287.4,2729.5
J2_79: CN14.8 J2.79 U1.A3 | length 1765.5
  Top Layer w7.09: v1(4675.2,3569.6) 4675.2,3720.6 4810,3855.4 4810,3985 4780,4015 J2.79@4710.8,4017.9
  Bottom Layer w7.09: v1(4675.2,3569.6) 4539.6,3569.6 4445,3475 U1.A3 4845,2975 4845,2744.1 CN14.8 CN14.8
J2_80: CN15.5 J2.80 | length 1523.3
  Top Layer w7.09: v1(4525,3990) 4552.9,4017.9 J2.80@4604.1,4017.9
  Bottom Layer w7.09: v1(4525,3990) 4525,3987.3 5425.3,3087 CN15.5@5425.3,2930.3
S$11929: 
S$11931: 
S$11933: 
S$11936: 
S$11939: 
S$54493: 
S$58913: 
U1_3.3V: U1.3.3V
U1_5V: U1.5V
U1_GND@2: U1.GND@2 | length 865
  Top Layer w10.24: v1(3195,4710) 3195,5275
  Bottom Layer w10.24: v1(3195,4410) v1(3195,4710)

## Keep-outs
Keep-Out Layer:
  circle w7.09 net S$54493: c5995.98,2199.02 r59.06
  circle w7.09 net S$54493: c1783.39,2199.02 r59.06
  circle w7.09 net S$54493: c5995.98,6450.98 r59.06
  circle w7.09 net S$54493: c1783.39,6450.98 r59.06

## Silkscreen, mask and mechanical layers (free items; w line width, h text height)
Top Overlay:
  lines w10 net S$11929: 2334.57,3813.19 2334.57,4836.81
  lines w10 net S$11931: 4972.36,3813.19 4972.36,4836.81
  lines w10 net S$11933: 2334.57,4836.81 4972.36,4836.81
  lines w10 net S$11936: 2334.57,3813.19 4972.36,3813.19
  lines w10 net S$11939: 2334.57,4125 2475,4125 2475,4524.82 2334.57,4524.82
  text "UART1 CTS" at 2930,7170 h80 r270
  text "UART1 RTS" at 2805,7165 h80 r270
  text "SPI1 MISO" at 4585,7145 h80 r270
  text "SPI1 MOSI" at 4870,7140 h80 r270
  text "UART1 TX" at 2465,7115 h80 r270
  text "UART1 RX" at 2595,7115 h80 r270
  text "SDC CMD" at 3975,7105 h80 r270
  text "I2C0 SDA" at 4445,7105 h80 r270
  text "I2C1 SDA" at 3075,7100 h80 r270
  text "I2C1 SD6" at 3210,7095 h80 r270
  text "CAN1 TX" at 3350,7095 h80 r270
  text "CAN1 RX" at 3555,7085 h80 r270
  text "SDC CLK" at 3835,7085 h80 r270
  text "I2C0 SCL" at 4315,7085 h80 r270
  text "USB1 D+" at 2040,7075 h80 r270
  text "USB1 ID" at 2320,7060 h80 r270
  text "USB1 D-" at 2185,7055 h80 r270
  text "SPI1 CK" at 4725,7055 h80 r270
  text "SDC D0" at 4115,7035 h80 r270
  text "PWM 4" at 5065,7025 h80 r270
  text "GPIO 3" at 5345,7025 h80 r270
  text "GPIO 1" at 5615,7020 h80 r270
  text "GPIO 4" at 5205,7015 h80 r270
  text "GPIO 2" at 5475,7015 h80 r270
  text "VSYS" at 3690,6950 h80 r270
  text "Portenta H7 Carrier Shield" at 1660,6135 h314.96 r270
  text "DMIC D0" at 3215,5610 h74.8 r270
  text "SWCK" at 2800,5600 h80 r270
  text "DMIC CK" at 3350,5600 h74.8 r270
  text "I2S MCK" at 4120,5600 h74.8 r270
  text "SPI1 CS" at 4325,5600 h74.8 r270
  text "PWM 5" at 5080,5600 h80 r270
  text "VSYS" at 3555,5595 h80 r270
  text "GPIO 6" at 5210,5595 h80 r270
  text "PWM 6" at 5345,5595 h59.05 r270
  text "GPIO 6" at 5485,5595 h59.05 r270
  text "PWM 8" at 5625,5595 h59.05 r270
  text "SWDIO" at 2600,5590 h80 r270
  text "V-SD" at 3075,5590 h80 r271
  text "I2S DI" at 3835,5590 h80 r270
  text "I2S WS" at 3970,5590 h80 r270
  text "PWM 2" at 4575,5590 h80 r270
  text "ADC VREF+" at 4735,5590 h80 r270
  text "SDC D1" at 2055,5585 h80 r270
  text "SDC D2" at 2195,5585 h80 r270
  text "SDC D3" at 2325,5585 h80 r270
  text "RESET" at 2480,5585 h80 r270
  text "SWO" at 2950,5585 h80 r270
  text "I2S DO" at 3695,5585 h80 r270
  text "PWM 1" at 4455,5580 h80 r270
  text "PWM 3" at 4885,5580 h80 r270
  text "FORCE" at 5840,5370 h59.05
  text "BOOTLOADER" at 5840,5330 h59.05
  text "Arduino PRO" at 1965,5300 h334.65 r270
  text "6" at 4010,5210 h59.05 r92
  text "0" at 4630,5210 h59.05 r78
  text "12" at 3375,5205 h59.05 r270
  text "10" at 3575,5205 h59.05 r269
  text "9" at 3675,5205 h59.05 r92
  text "8" at 3775,5205 h59.05 r84
  text "7" at 3925,5205 h59.05 r90
  text "5" at 4115,5205 h59.05 r83
  text "4" at 4225,5205 h59.05 r57
  text "3" at 4325,5205 h59.05 r87
  text "2" at 4425,5205 h59.05 r90
  text "1" at 4525,5205 h59.05 r90
  text "Aref" at 3070,5200 h59.05 r272
  text "13" at 3275,5200 h59.05 r269
  text "11" at 3475,5200 h59.05 r270
  text "GND" at 3175,5195 h59.05 r271
  text "CAM D7" at 5830,5185 h80
  text "CAM D6" at 5835,5040 h80
  text "CAM D5" at 5835,4900 h80
  text "rufus31415.github.io" at 3280,4790 h106.3 r270
  text "CAM D4" at 5835,4770 h80
  text "1" at 4735,4635 h39.37 r90
  text "80" at 3060,4620 h39.37 r90
  text "CAM D3" at 5835,4570 h80
  text "CAM D2" at 5830,4425 h80
  text "CAM D1" at 5840,4285 h80
  text "CAM D0" at 5840,4150 h80
  text "80" at 4565,4025 h39.37 r270
  text "1" at 2890,4010 h39.37 r270
  text "CAM VS" at 5840,4010 h80
  text "CAM CLK" at 5845,3810 h80
  text "CAM HS" at 5840,3670 h80
  text "Reset" at 3430,3560 h59.05 r269
  text "+3V3" at 3525,3540 h59.05 r270
  text "GND" at 3725,3535 h59.05 r271
  text "GND" at 3825,3535 h59.05 r271
  text "UART2 TX" at 5845,3535 h80
  text "Vin" at 3925,3505 h59.05 r270
  text "NC" at 3620,3500 h59.05 r270
  text "A1" at 4230,3495 h59.05 r270
  text "A2" at 4330,3495 h59.05 r270
  text "A3" at 4430,3495 h59.05 r269
  text "A4" at 4525,3495 h59.05 r270
  text "A0" at 4125,3490 h59.05 r269
  text "A5" at 4630,3490 h59.05 r270
  text "UART2 RX" at 5845,3395 h80
  text "DSI D0+" at 2405,3340 h80 r270
  text "DSI D1+" at 2255,3335 h80 r270
  text "DSI CK+" at 2665,3335 h80 r270
  text "DSI D0-" at 2530,3325 h80 r270
  text "DSI D1-" at 2105,3320 h80 r270
  text "DSI CK-" at 2880,3320 h80 r270
  text "UART0 TX" at 3635,3315 h62.99 r270
  text "UART0 RX" at 3790,3315 h62.99 r270
  text "UART0 RTS" at 3925,3305 h59.84 r270
  text "UART0 CTS" at 4055,3305 h59.84 r270
  text "USB0 D+" at 3310,3290 h66.93 r270
  text "USB0 D-" at 3450,3290 h66.93 r270
  text "GPIO 0" at 5845,3265 h80
  text "GND" at 3015,3225 h80 r271
  text "GND" at 3150,3220 h80 r271
  text "VIN" at 4190,3190 h80 r270
  text "A0" at 4390,3150 h80 r269
  text "A5" at 5140,3145 h80 r270
  text "A6" at 5275,3145 h80 r269
  text "A7" at 5415,3145 h80 r270
  text "A2" at 4670,3140 h80 r270
  text "A3" at 4800,3140 h80 r269
  text "A4" at 4940,3140 h80 r270
  text "A1" at 4535,3135 h80 r270
  text "PWM 8" at 5520,3070 h62.99
  text "PWM 9" at 5815,3040 h80 r270
  text "v1.1" at 1730,2025 h157.48 r270
  text "GND" at 4940,1910 h80 r271
  text "COINCELL" at 5700,1910 h76.77 r270
  text "USB VBUS" at 2110,1905 h76.77 r270
  text "GND" at 4800,1905 h80 r271
  text "UART3 RX" at 5140,1905 h76.77 r270
  text "ETH L1" at 2530,1900 h80 r270
  text "ETH A+" at 3150,1900 h80 r270
  text "+3V3" at 3285,1900 h80 r270
  text "+3V3" at 3425,1900 h80 r270
  text "PWM 10" at 3630,1900 h80 r270
  text "SAI D0" at 3905,1900 h80 r270
  text "SAI CK" at 4045,1900 h80 r270
  text "SAI CK" at 4180,1900 h80 r270
  text "I2C2 SCL" at 4385,1900 h80 r270
  text "SOURCE" at 4495,1900 h62.99 r270
  text "I2C2 SDA" at 4655,1900 h80 r270
  text "GND" at 5275,1900 h80 r271
  text "+3V3" at 5415,1900 h80 r270
  text "ON REQ" at 5535,1900 h62.99 r267
  text "+3V3" at 2250,1895 h80 r270
  text "ETH L2" at 2390,1895 h80 r270
  text "ETH B-" at 2665,1895 h80 r270
  text "ETH B+" at 2875,1895 h80 r270
  text "ETH A-" at 3010,1895 h80 r270
  text "BOOT" at 4550,1895 h62.99 r270
  text "POWER" at 5590,1895 h62.99 r270
  text "VREF-" at 3765,1890 h80 r270

## Text inside footprints (layer, text, board x,y; h text height)
U1: Document "GND" at 3730,3495 h20 r270; Document "GND" at 3830,3495 h20 r270; Document "+5V" at 3630,3495 h20 r270; Document "Reset" at 3430,3515 h20 r270; Document "Vin" at 3941.09,3489.54 h20 r243; Document "+3.3V" at 3530,3515 h20 r270; Document "0" at 4175,3417 h20 r90; Document "1" at 4275,3417 h20 r90; Document "2" at 4375,3417 h20 r90; Document "3" at 4475,3417 h20 r90; Document "4" at 4573.09,3411.12 h20 r54; Document "5" at 4675,3417 h20 r90; Document "Analog In" at 4540,3517 h20 r270; Document "GND" at 3165,5225 h20 r270; Document "13" at 3265,5225 h20 r270; Document "12" at 3365,5225 h20 r270; Document "11" at 3475,5215 h20; Document "Aref" at 3065,5225 h20 r270; Document "10" at 3565,5225 h20 r270; Document "9" at 3684.96,5225.87 h20 r95; Document "8" at 3785,5225 h20 r90; Document "7" at 3934.06,5220.77 h20 r65; Document "6" at 4034.96,5225.87 h20 r95; Document "5" at 4135,5225 h20 r90; Document "4" at 4233.09,5219.12 h20 r54; Document "3" at 4335,5225 h20 r90; Document "2" at 4435,5225 h20 r90; Document "TX" at 4515,5225 h20 r270; Document "RX" at 4615,5225 h20 r270